# EAGLE board power mux-v8 (EAGLE 6.5.0)
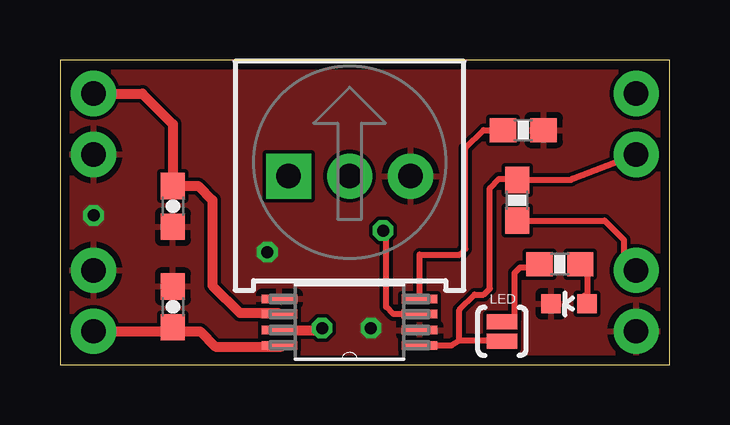
[diagram p0: board, top side]
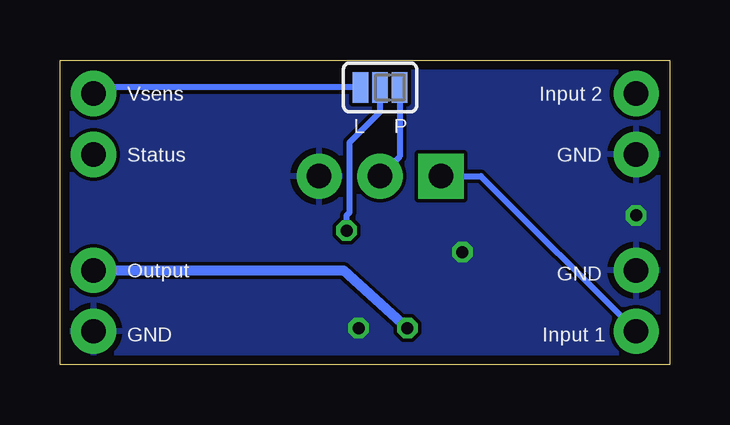
[diagram p1: board, bottom side, seen from below]

Size 25.4 x 12.7 mm. Coordinates in mm from the lower left corner, seen from the top.
Outline: 0,0 25.4,0 25.4,12.7 0,12.7 0,0
Copper layers (1*16): Top 0.0356mm / dielectric 1.5011mm / Bottom 0.0356mm
Design rules "LaenPCBOrder": minimum track width 6mil, minimum drill 13mil, track to track 6mil, track to pad 6mil, pad to pad 6mil, via to via 6mil, smd to smd 6mil, copper to edge 15mil, drill to drill 6mil, minimum pad ring 7mil, minimum via ring 7mil, stop-mask expansion 3mil, vias tented up to drill 0mil, thermal gap 10mil

## Footprints (pad centres in the part's own frame; a part is rotated, then mirrored left to right if it is on the bottom)
0603-CAP = smd 1.1 x 1: 1 -0.85,0; 2 0.85,0
LED-0603 = smd 0.8 x 0.8: A 0,-0.75; C 0,0.75
1X02_NO_SILK = drill 1.016 pad 1.88: 1 0,0; 2 2.54,0
3386U = drill 1.016 pad 1.88 square: 1 -2.54,-0.015 | drill 1.016 pad 1.88: 2 0,-0.015; 3 2.54,-0.015
0603-RES = smd 1.1 x 1: 1 -0.85,0; 2 0.85,0
SJ_3_PASTE1&2 = smd 0.635 x 1.27: 1 -0.813,0; 2 0,0; 3 0.813,0
SJ_2S-NOTRACE = smd 0.635 x 1.27: 1 -0.401,0; 2 0.413,0
SOP65P640X120-8N = smd 1.473 x 0.356: 1 -2.921,0.965; 2 -2.921,0.33; 3 -2.921,-0.33; 4 -2.921,-0.965; 5 2.921,-0.965; 6 2.921,-0.33; 7 2.921,0.33; 8 2.921,0.965

## Placement (x,y rotation side)
C1  1uf  [0603-CAP]  4.7,2.41 270 top
C2  1uf  [0603-CAP]  4.7,6.6 270 top
D1  GREEN  [LED-0603]  21.21,2.54 90 top
JP3  M021X02_NO_SILK  [1X02_NO_SILK]  1.4,3.94 270 top
JP4  M021X02_NO_SILK  [1X02_NO_SILK]  1.4,8.76 90 top
JP5  M021X02_NO_SILK  [1X02_NO_SILK]  24,8.76 90 top
JP6  M021X02_NO_SILK  [1X02_NO_SILK]  24,1.4 90 top
R1  TRIMPOT-PTH-KNOB  [3386U]  12.06,7.87 0 top
R5  400  [0603-RES]  19.3,9.78 180 top
R6  4.7k  [0603-RES]  19.05,6.86 90 top
R7  180  [0603-RES]  20.83,4.19 0 top
SJ1  [SJ_3_PASTE1&2]  12.06,11.56 180 bottom
SJ2  SOLDERJUMPERNC2  [SJ_2S-NOTRACE]  18.41,1.4 270 top
U1  TPS2113APWR  [SOP65P640X120-8N]  12.06,1.78 180 top

## Library data of the parts
C1 C2 R5-R7 SJ1 SJ2 = SparkFun-Passives
D1 = SparkFun-LED; PROD_ID: DIO-00821
JP3-JP6 = SparkFun-Connectors
R1 = SparkFun-Electromechanical
U1 = Texas Instruments_By_element14_Batch_1; MPN: TPS2113APWR; OC_FARNELL: 1757288; OC_NEWARK: 01J0961; PACKAGE: TSSOP-8; SUPPLIER: TEXAS INSTRUMENTS

## Nets
GND: C1.1 C2.2 D1.C JP3.1 JP4.1 JP6.1 R1.3 R5.1 U1.2 U1.5
ILIM: R5.2 U1.4
IN1: C1.2 JP3.2 R1.1 U1.8
IN2: C2.1 JP4.2 U1.6
N$1: D1.A R7.2
N$2: R1.2 SJ1.1
N$3: R7.1 SJ2.1
OUT: JP6.2 R6.1 U1.7
SELECT: JP5.2 SJ1.3
STAT: JP5.1 R6.2 SJ2.2 U1.1
VSENS: SJ1.2 U1.3

## Tracks (layer width: path | path; a pad name or v marks a point on that pad's centre or on a via)
GND  (via drill 0.5)
  other vias: 8.64,4.7 1.4,6.22 12.95,1.52
  pour Bottom: 0,12.7 25.4,12.7 25.4,0 0,0
  pour Top: 0,12.7 25.4,12.7 25.4,0 0,0
ILIM
  Top 0.254: U1.4 14.99,4.59 16.65,4.59 16.89,4.83 16.89,9.02 17.65,9.78 R5.2
IN1
  Top 0.406: U1.8 9.22,0.76 6.48,0.76 5.84,1.4 4.7,1.4 | JP3.2 4.7,1.4 | 4.7,1.4 C1.2
  Bottom 0.254: R1.1 7.86,7.86 JP3.2
IN2
  Top 0.406: JP4.2 3.43,11.3 4.7,10.03 C2.1 5.75,7.45 6.35,6.86 6.35,3.3 7.49,2.16 9.09,2.16 U1.6
N$1
  Top 0.254: 21.86,2.89 D1.A 21.97,2.55 21.97,3.94 21.72,4.19 R7.2
N$2
  Bottom 0.254: SJ1.1 11.25,8.67 R1.2
N$3
  Top 0.254: SJ2.1 18.94,1.93 18.94,3.83 19.18,4.06 19.85,4.06 R7.1
OUT  (via drill 0.5)
  Top 0.254: R6.1 22.69,6.01 23.5,5.21 23.5,4.45 JP6.2
  Top 0.406: U1.7 10.85,1.45 v10.92,1.52
  Bottom 0.406: JP6.2 13.59,3.94 v10.92,1.52
SELECT
  Bottom 0.254: SJ1.3 23.75,11.56 JP5.2
STAT
  Top 0.254: U1.1 16.31,0.81 16.64,1.02 | 16.64,1.02 16.64,2.29 17.27,2.92 17.65,2.92 17.91,3.17 17.91,7.37 18.29,7.75 19.01,7.75 R6.2 21.3,7.71 21.35,7.76 JP5.1 | 16.64,1.02 18.32,1.02 SJ2.2
VSENS  (via drill 0.5)
  Top 0.254: U1.3 13.89,2.11 13.59,2.41 13.59,5.46 v13.46,5.59
  Bottom 0.254: v13.46,5.59 13.46,6.22 13.34,6.35 13.34,9.27 12.06,10.54 SJ1.2

## Text on the board
tPlace: LED
bPlace: Input 2 | Vsens | P | L | GND | Status | GND | Output | Input 1 | GND